# EAGLE board HeepTeensyBoard (EAGLE 7.3.0)
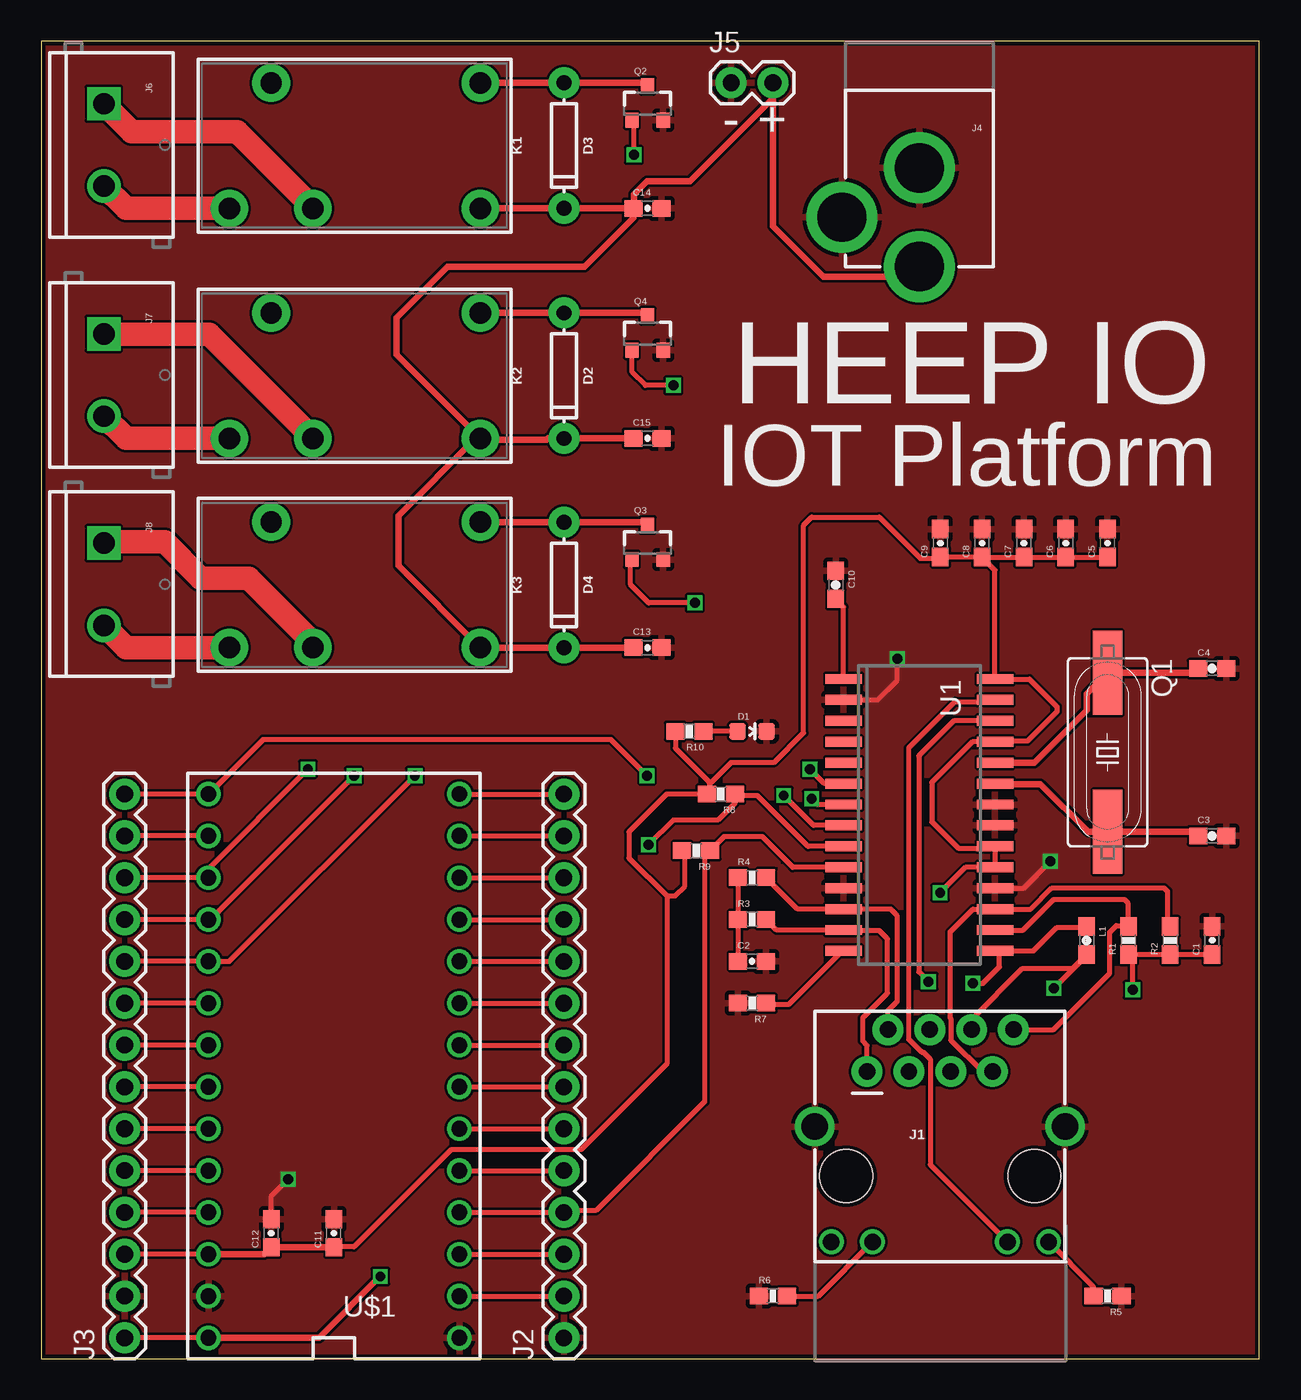
[diagram p0: board, top side]
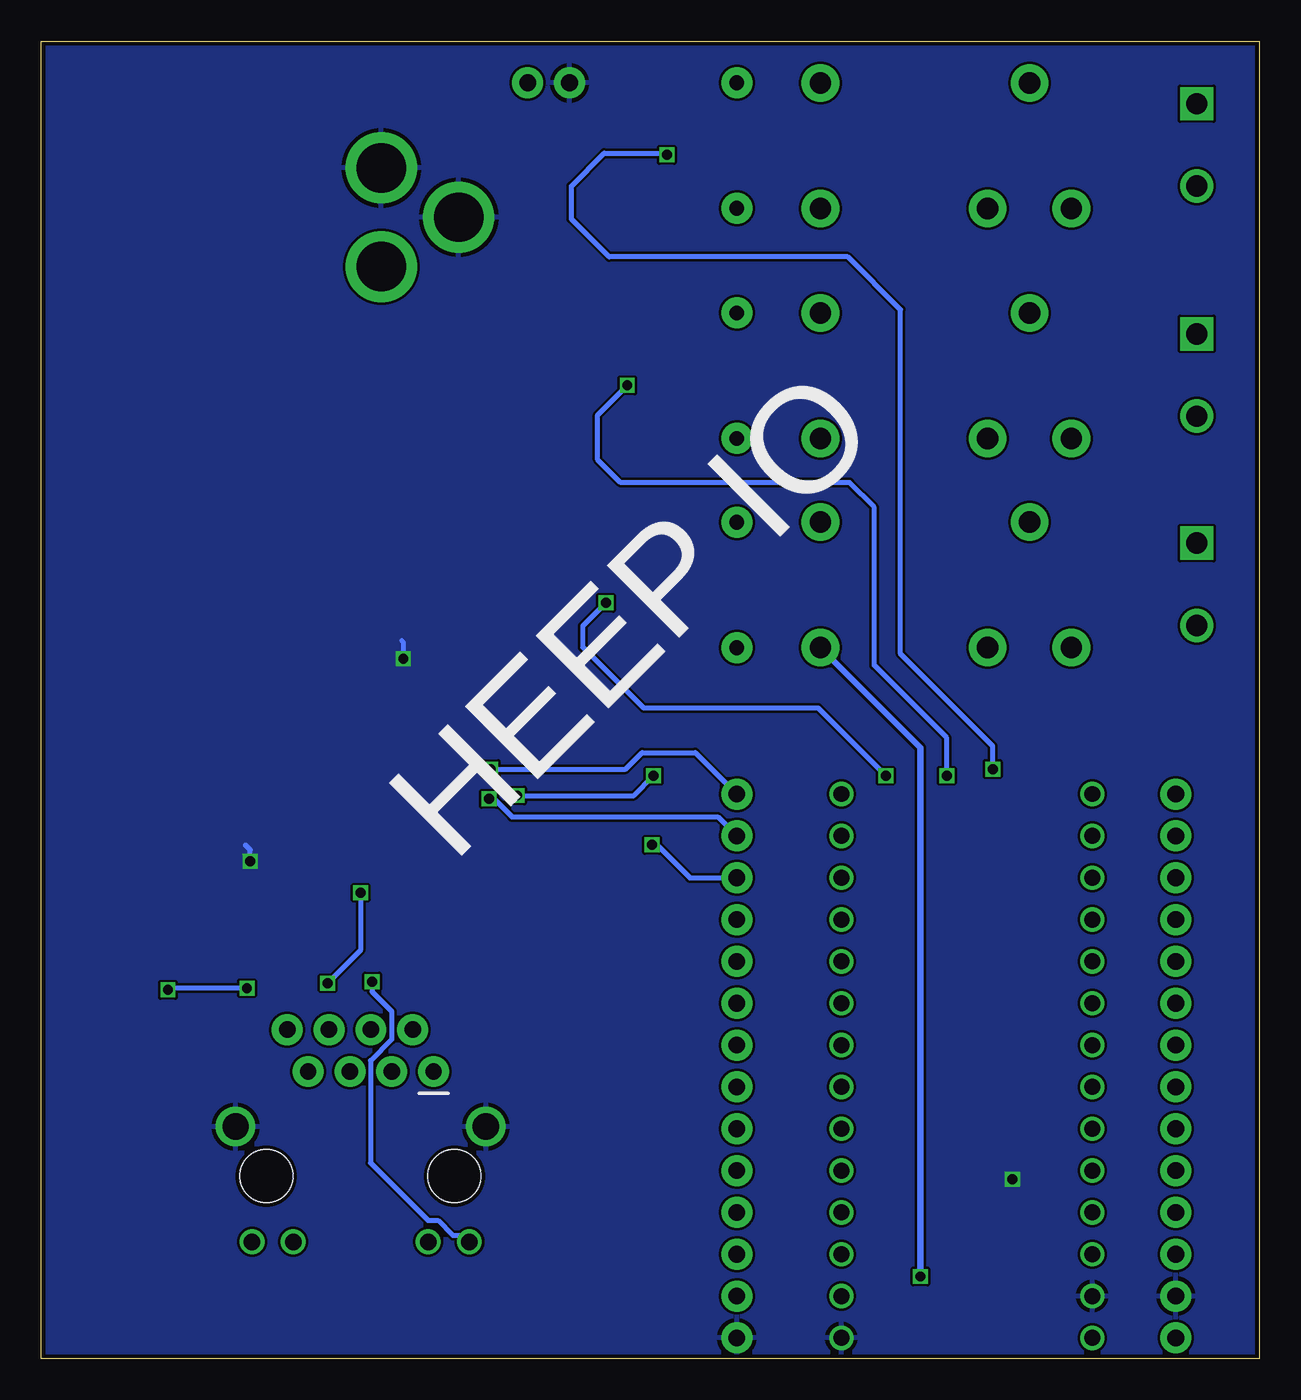
[diagram p1: board, bottom side, seen from below]

Size 74 x 80 mm. Coordinates in mm from the lower left corner, seen from the top.
Outline: 0,0 74,0 74,80 0,80 0,0
Copper layers (1*16): Top 0.035mm / dielectric 1.5mm / Bottom 0.035mm
Design rules "SeeedStudio_2layer_DRU_no_angle_20140221": minimum track width 6mil, minimum drill 12mil, track to track 6mil, track to pad 6mil, pad to pad 6mil, via to via 6mil, smd to smd 0mil, copper to edge 10mil, drill to drill 10mil, minimum pad ring 10mil, minimum via ring 6mil, stop-mask expansion 2mil, vias tented up to drill 100mil, thermal gap 10mil

## Footprints (pad centres in the part's own frame; a part is rotated, then mirrored left to right if it is on the bottom)
0603-CAP = smd 1.1 x 1: 1 -0.85,0; 2 0.85,0
LED-0603 = smd 1 x 1: A 0,-0.877; C 0,0.877
DIODE-1N4148 = drill 0.9 pad 1.88: A -3.81,0; C 3.81,0
MAGJACK = drill 1 pad 1.88: 1 3.175,17.445; 2 4.445,19.985; 3 5.715,17.445; 4 6.985,19.985; 5 8.255,17.445; 6 9.525,19.985; 7 10.795,17.445; 8 12.065,19.985 | drill 1 pad 1.27: 9 1,7.1; 10 3.5,7.1; 11 11.7,7.1; 12 14.2,7.1 | drill 1.6 pad 2.184: M1 0,14.1; M2 15.2,14.1 | hole 3.2: 1.905,11.095; 13.335,11.095
1X14 = drill 1.016 pad 1.88: 1 0,0; 2 2.54,0; 3 5.08,0; 4 7.62,0; 5 10.16,0; 6 12.7,0; 7 15.24,0; 8 17.78,0; 9 20.32,0; 10 22.86,0; 11 25.4,0; 12 27.94,0; 13 30.48,0; 14 33.02,0
POWER_JACK_PTH = drill 2.997 pad 4.318: GND 0,7.7; GNDBREAK 4.7,10.7; PWR 0,13.7
1X02 = drill 1.016 pad 1.88: 1 0,0; 2 2.54,0
SCREWTERMINAL-5MM-2 = drill 1.3 pad 2.032 square: 1 0,0 | drill 1.3 pad 2.032: 2 5,0
RELAY-JZC = drill 1.3 pad 2.286: 1 3.81,-8.89; 2 -3.81,1.27; 3 -3.81,6.35; 4 3.81,3.81; 5 -3.81,-8.89
0603 = smd 1.1 x 1: 1 -0.85,0; 2 0.85,0
SM49 = smd 5.08 x 1.778: 1 -4.826,0; 2 4.826,0
SOT23-3 = smd 0.8 x 0.9: 1 -0.95,-1; 2 0.95,-1; 3 0,1.1
0603-RES = smd 1.1 x 1: 1 -0.85,0; 2 0.85,0
SO28W = smd 0.6 x 2.2: 1 -8.255,-4.6; 2 -6.985,-4.6; 3 -5.715,-4.6; 4 -4.445,-4.6; 5 -3.175,-4.6; 6 -1.905,-4.6; 7 -0.635,-4.6; 8 0.635,-4.6; 9 1.905,-4.6; 10 3.175,-4.6; 11 4.445,-4.6; 12 5.715,-4.6; 13 6.985,-4.6; 14 8.255,-4.6; 15 8.255,4.6; 16 6.985,4.6; 17 5.715,4.6; 18 4.445,4.6; 19 3.175,4.6; 20 1.905,4.6; 21 0.635,4.6; 22 -0.635,4.6; 23 -1.905,4.6; 24 -3.175,4.6; 25 -4.445,4.6; 26 -5.715,4.6; 27 -6.985,4.6; 28 -8.255,4.6
TEENSY_3.0-3.2&LC_DIL = drill 0.965: 0 -7.62,13.97; 1 -7.62,11.43; 2 -7.62,8.89; 3 -7.62,6.35; 3.3V 7.62,11.43; 4 -7.62,3.81; 5 -7.62,1.27; 6 -7.62,-1.27; 7 -7.62,-3.81; 8 -7.62,-6.35; 9 -7.62,-8.89; 10 -7.62,-11.43; 11 -7.62,-13.97; 12 -7.62,-16.51; 13 7.62,-16.51; 14/A0 7.62,-13.97; 15/A1 7.62,-11.43; 16/A2 7.62,-8.89; 17/A3 7.62,-6.35; 18/A4 7.62,-3.81; 19/A5 7.62,-1.27; 20/A6 7.62,1.27; 21/A7 7.62,3.81; 22/A8 7.62,6.35; 23/A9 7.62,8.89; AGND 7.62,13.97; GND -7.62,16.51; VIN 7.62,16.51

## Placement (x,y rotation side)
C1  0.1uF  [0603-CAP]  71.12,25.4 90 top
C2  0.1uF  [0603-CAP]  43.18,24.13 0 top
C3  10pF  [0603-CAP]  71.12,31.75 0 top
C4  10pF  [0603-CAP]  71.12,41.91 0 top
C5  0.1uF  [0603-CAP]  64.77,49.53 90 top
C6  0.1uF  [0603-CAP]  62.23,49.53 90 top
C7  0.1uF  [0603-CAP]  59.69,49.53 90 top
C8  0.1uF  [0603-CAP]  57.15,49.53 90 top
C9  0.1uF  [0603-CAP]  54.61,49.53 90 top
C10  10uF  [0603-CAP]  48.26,46.99 270 top
C11  0.1uF  [0603-CAP]  17.78,7.62 90 top
C12  0.1uF  [0603-CAP]  13.97,7.62 90 top
C13  0.1uF  [0603-CAP]  36.83,43.18 0 top
C14  0.1uF  [0603-CAP]  36.83,69.85 0 top
C15  0.1uF  [0603-CAP]  36.83,55.88 0 top
D1  RED  [LED-0603]  43.18,38.1 270 top
D2  200mA/100V/1V  [DIODE-1N4148]  31.75,59.69 270 top
D3  200mA/100V/1V  [DIODE-1N4148]  31.75,73.66 270 top
D4  200mA/100V/1V  [DIODE-1N4148]  31.75,46.99 270 top
J1  MAGJACK  [MAGJACK]  46.99,0 0 top
J2  [1X14]  31.75,1.27 90 top
J3  [1X14]  5.08,1.27 90 top
J4  POWER_JACKPTH  [POWER_JACK_PTH]  53.34,80.01 180 top
J5  [1X02]  41.91,77.47 0 top
J6  [SCREWTERMINAL-5MM-2]  3.81,76.2 270 top
J7  [SCREWTERMINAL-5MM-2]  3.81,62.23 270 top
J8  [SCREWTERMINAL-5MM-2]  3.81,49.53 270 top
K1  RELAY-SPDT-JZC-11F  [RELAY-JZC]  17.78,73.66 90 top
K2  RELAY-SPDT-JZC-11F  [RELAY-JZC]  17.78,59.69 90 top
K3  RELAY-SPDT-JZC-11F  [RELAY-JZC]  17.78,46.99 90 top
L1  [0603]  63.5,25.4 270 top
Q1  25MHz  [SM49]  64.77,36.83 270 top
Q2  [SOT23-3]  36.83,76.2 0 top
Q3  [SOT23-3]  36.83,49.53 0 top
Q4  [SOT23-3]  36.83,62.23 0 top
R1  51  [0603-RES]  66.04,25.4 90 top
R2  51  [0603-RES]  68.58,25.4 90 top
R3  51  [0603-RES]  43.18,26.67 0 top
R4  51  [0603-RES]  43.18,29.21 0 top
R5  200  [0603-RES]  64.77,3.81 180 top
R6  200  [0603-RES]  44.45,3.81 0 top
R7  2k @ 1% Tolerance  [0603-RES]  43.18,21.59 180 top
R8  10k  [0603-RES]  41.28,34.29 180 top
R9  10k  [0603-RES]  39.78,30.85 180 top
R10  200  [0603-RES]  39.37,38.1 180 top
U1  ENC28J60-SO  [SO28W]  53.34,33.02 270 top
U$1  TEENSY_3.1-3.2_DIL  [TEENSY_3.0-3.2&LC_DIL]  17.78,17.78 180 top

## Library data of the parts
C1 C2 C5-C9 C11-C15 = SparkFun-Capacitors
C3 C4 C10 L1 R7-R10 = SparkFun-Passives
D1 = SparkFun-LED; PROD_ID: DIO-00819
D2-D4 = SparkFun-DiscreteSemi; PROD_ID: DIO-08378
J1 = SparkFun-Connectors; PROD_ID: CONN-09556; SF_ID: PRT-08534
J2 J3 J5 = SparkFun-Connectors
J4 = SparkFun-Connectors; PROD_ID: CONN-08197
J6-J8 = SparkFun-Connectors; STOREFRONT_ID: PRT-08432
K1-K3 = SparkFun-Electromechanical; PROD_ID: COMP-09533; SF_SKU: COM-00100
Q1 = adafruit; OC_FARNELL: unknown; OC_NEWARK: unknown
Q2-Q4 = SparkFun-DiscreteSemi; PROD_ID: TRANS-08049
R1-R6 = SparkFun-Resistors
U1 = microchip-enc28j60
U$1 = Teensy_3_and_LC_Series_Boards_v1.4

## Nets
3.3V: C5.1 C6.1 C7.1 C8.1 C9.1 C11.1 C12.1 J3.3 L1.1 R8.2 R9.2 R10.2 U1.15 U1.19 U1.20 U1.25 U1.28 U$1.3.3V
#CS: J2.12 R8.1 U1.9 U$1.10
#RESET: J2.4 R9.1 U1.10 U$1.2
GND: C1.2 C2.2 C3.2 C4.2 C5.2 C6.2 C7.2 C8.2 C9.2 C10.1 C11.2 C12.2 C13.2 C14.2 C15.2 D1.C J1.M1 J1.M2 J2.1 J3.2 J4.GND J4.GNDBREAK J5.1 Q2.2 Q3.2 Q4.2 R5.1 R6.1 R7.2 U1.2 U1.11 U1.18 U1.21 U1.22 U$1.AGND U$1.GND
LEDA: J1.11 U1.27
LEDB: J1.9 U1.26
N$1: J1.1 R3.2 U1.13
N$2: J1.2 R4.2 U1.12
N$3: J1.8 R1.2 U1.16
N$4: J1.7 R2.2 U1.17
N$5: C2.1 R3.1 R4.1
N$6: J1.10 R6.2
N$7: C1.1 J1.6 L1.2 R1.1 R2.1
N$8: D1.A R10.1
N$9: D3.A K1.1 Q2.3
N$10: J1.12 R5.2
N$11: D2.A K2.1 Q4.3
N$12: C3.1 Q1.2 U1.23
N$13: C4.1 Q1.1 U1.24
N$14: D4.A K3.1 Q3.3
N$15: R7.1 U1.14
N$16: J6.1 K1.2
N$17: C10.2 U1.1
N$18: J6.2 K1.3
N$19: J7.1 K2.2
N$20: J7.2 K2.3
N$21: J8.1 K3.2
N$22: J8.2 K3.3
SCK: J3.14 U1.8 U$1.13
SI: J2.13 U1.7 U$1.11
SO: J2.14 U1.6 U$1.12
TEENSY0: J2.2 U$1.0
TEENSY1: J2.3 U$1.1
TEENSY3: J2.5 U$1.3
TEENSY4: J2.6 U$1.4
TEENSY5: J2.7 U$1.5
TEENSY6: J2.8 U$1.6
TEENSY7: J2.9 U$1.7
TEENSY8: J2.10 U$1.8
TEENSY9: J2.11 U$1.9
TEENSY14: J3.13 U$1.14/A0
TEENSY15: J3.12 Q2.1 U$1.15/A1
TEENSY16: J3.11 Q4.1 U$1.16/A2
TEENSY17: J3.10 Q3.1 U$1.17/A3
TEENSY18: J3.9 U$1.18/A4
TEENSY19: J3.8 U$1.19/A5
TEENSY20: J3.7 U$1.20/A6
TEENSY21: J3.6 U$1.21/A7
TEENSY22: J3.5 U$1.22/A8
TEENSY23: J3.4 U$1.23/A9
VIN: C13.1 C14.1 C15.1 D2.C D3.C D4.C J3.1 J4.PWR J5.2 K1.5 K2.5 K3.5 U$1.VIN

## Tracks (layer width: path | path; a pad name or v marks a point on that pad's centre or on a via)
3.3V  (via drill 0.6)
  Top 0.305: L1.1 63.45,26.2 61.7,26.2 60.27,24.77 U1.15 58.2,24.5 58.2,23.8 57.2,22.8 v56.6,22.8 | C8.1 57.94,47.89 U1.28 60.02,41.27 61.7,39.6 61.7,39.3 59.9,37.5 57.98,37.5 U1.25 56.56,37.47 54.1,35 54.1,32.6 55.7,31 57.83,31 U1.20 U1.19 56.15,29.84 v54.6,28.3 | C8.1 C7.1 C6.1 C5.1 | C8.1 C9.1 54.53,48.6 53.4,48.6 50.9,51.1 46.8,51.1 46.3,50.6 46.3,38 44.5,36.2 41.9,36.2 40.6,34.9 | R10.2 38.52,37.08 40.6,35 40.6,34.9 | 40.6,34.9 40.6,34.46 R8.2 37.99,34.29 35.7,32 35.7,30.4 38,28.1 | 38,28.1 38.5,28.1 39.1,28.7 39.1,30.68 R9.2 | 38,28.1 38,17.9 32.8,12.7 24.9,12.7 19,6.8 17.81,6.8 C11.1 | U$1.3.3V J3.3
  Top 0.406: U$1.3.3V 13.55,6.35 C12.1 C11.1
  Bottom 0.305: v54.6,28.3 54.6,24.8 v56.6,22.8
#CS  (via drill 0.6)
  Top 0.305: U1.9 46.59,31.11 43.5,34.2 42.22,34.2 R8.1 42.13,33.73 41.1,32.7 38.4,32.7 v36.9,31.2 | U$1.10 J2.12 | J2.12 32.29,29.21 32.3,29.2 J2.12
  Bottom 0.305: v36.9,31.2 36.6,31.2 34.6,29.2 J2.12
#RESET
  Top 0.305: U1.10 45.66,29.84 43.8,31.7 41.48,31.7 R9.1 40.3,30.52 40.3,15.6 33.7,9 31.86,9 J2.4 U$1.2
GND  (via drill 0.6)
  Top 0.305: U1.18 59.67,28.57 v61.3,30.2 | U1.2 50.8,40.01 52,41.2 v52,42.5 | C12.2 13.97,9.87 v15,10.9
  Bottom 0.305: v61.3,30.2 61.3,30.9 61.6,31.2 | v52,42.5 52,43.5 52.1,43.6 | v15,10.9 15.2,10.9 15.3,10.8
  pour Top: -12.7,88.9 109.22,88.9 109.22,-7.62 -12.7,-7.62
  pour Bottom: -8.9,85.4 107.5,85.4 107.5,67.8 107.5,-5.1 -8.9,-5.1
LEDA
  Top 0.305: U1.27 57.84,39.9 55.5,39.9 52.7,37.1 52.7,19.4 53.5,18.6 53.6,18.6 54,18.2 54,11.79 J1.11
LEDB  (via drill 0.6)
  Top 0.305: U1.26 55.44,38.73 53.3,36.6 53.3,23.5 v53.9,22.9
  Bottom 0.305: v53.9,22.9 53.9,22.3 52.7,21.1 52.7,19.4 54,18.1 54,11.9 50.5,8.4 49.9,8.4 49,7.5 48.39,7.5 J1.9
N$1
  Top 0.305: J1.1 50.16,19.04 49.9,19.3 49.9,20.7 51.4,22.2 51.4,25.5 50.9,26 48.77,26 U1.13 44.66,26.04 R3.2
N$2
  Top 0.305: J1.2 51.44,21.14 52,21.7 52,26.9 51.6,27.3 U1.12 45.94,27.3 R4.2
N$3
  Top 0.305: U1.16 59.63,26.04 61.5,27.9 65.8,27.9 66,27.7 66,26.29 R1.2 65.99,26.3 65.3,26.3 64.9,25.9 64.9,23.4 61.48,19.98 J1.8
N$4
  Top 0.305: R2.2 68.4,26.43 68.4,28.4 68.2,28.6 61.4,28.6 60.1,27.3 U1.17 56.6,27.3 55.2,25.9 55.2,20.7 55.25,20.65 55.25,19.35 57.16,17.45 J1.7
N$5
  Top 0.305: R4.1 R3.1 C2.1
N$6
  Top 0.305: R6.2 47.2,3.81 J1.10
N$7  (via drill 0.6)
  Top 0.305: J1.6 56.52,20.61 59.6,23.7 62.65,23.7 L1.2 63.5,24.5 v61.5,22.5 | v66.3,22.4 66.3,24.29 R1.1 R2.1 C1.1
  Bottom 0.305: v61.5,22.5 66.2,22.5 v66.3,22.4
N$8
  Top 0.305: D1.A R10.1
N$9
  Top 0.406: Q2.3 36.66,77.47 D3.A K1.1
N$10
  Top 0.305: R5.2 63.92,4.37 J1.12
N$11
  Top 0.406: K2.1 D2.A 36.66,63.5 Q4.3
N$12
  Top 0.406: C3.1 70.02,32 Q1.2 63.6,32 60.7,34.9 57.97,34.9 U1.23
N$13
  Top 0.406: U1.24 60.33,36.2 63.5,39.37 63.5,40.39 Q1.1 70.02,41.66 C4.1
N$14
  Top 0.406: Q3.3 36.66,50.8 D4.A K3.1
N$15
  Top 0.305: U1.14 48.66,24.77 45.4,21.5 44.12,21.5 R7.1
N$16
  Top 1.422: K1.2 16.51,69.89 11.9,74.5 5.51,74.5 J6.1
N$17
  Top 0.305: U1.1 48.74,45.66 C10.2
N$18
  Top 1.422: K1.3 5.16,69.85 J6.2
N$19
  Top 1.422: K2.2 10.2,62.2 3.84,62.2 J7.1
N$20
  Top 1.422: K2.3 5.16,55.88 J7.2
N$21
  Top 1.422: K3.2 16.51,43.49 12.6,47.4 9.7,47.4 7.5,49.6 3.88,49.6 J8.1
N$22
  Top 1.422: K3.3 5.16,43.18 J8.2
SCK  (via drill 0.6)
  Top 0.305: U1.8 46.91,32.38 v45.1,34.2 | v36.8,35.4 34.6,37.6 13.47,37.6 U$1.13 J3.14
  Bottom 0.305: v45.1,34.2 38,34.2 v36.8,35.4
SI  (via drill 0.6)
  Top 0.305: U1.7 47.15,33.66 v46.8,34 | U$1.11 J2.13
  Bottom 0.305: v46.8,34 46.5,34 45.4,32.9 32.9,32.9 J2.13
SO  (via drill 0.6)
  Top 0.305: U1.6 47.58,34.92 v46.7,35.8 | U$1.12 J2.14
  Bottom 0.305: v46.7,35.8 38.5,35.8 37.5,36.8 34.26,36.8 J2.14
TEENSY0
  Top 0.305: U$1.0 J2.2 | J2.2 32.29,3.81 32.4,3.7 31.86,3.7 J2.2
TEENSY1
  Top 0.305: U$1.1 J2.3
TEENSY3
  Top 0.305: U$1.3 J2.5
TEENSY4
  Top 0.305: U$1.4 J2.6
TEENSY5
  Top 0.305: U$1.5 J2.7
TEENSY6
  Top 0.305: U$1.6 J2.8
TEENSY7
  Top 0.305: U$1.7 J2.9
TEENSY8
  Top 0.305: U$1.8 J2.10
TEENSY9
  Top 0.305: U$1.9 J2.11
TEENSY14
  Top 0.305: U$1.14/A0 J3.13
TEENSY15  (via drill 0.6)
  Top 0.305: v16.2,35.8 10.16,29.76 U$1.15/A1 J3.12 | v36,73.1 36,75.08 Q2.1
  Bottom 0.305: v16.2,35.8 16.2,37.2 21.8,42.8 21.8,63.7 25,66.9 39.5,66.9 41.8,69.2 41.8,71.2 39.8,73.2 36.1,73.2 v36,73.1
TEENSY16  (via drill 0.6)
  Top 0.305: v19,35.4 10.27,26.67 U$1.16/A2 J3.11 | v38.4,59.1 36.7,59.1 35.9,59.9 35.9,61.21 Q4.1
  Bottom 0.305: v19,35.4 19,37.7 23.4,42.1 23.4,51.7 24.9,53.2 38.8,53.2 40.2,54.6 40.2,57.3 v38.4,59.1
TEENSY17  (via drill 0.6)
  Top 0.305: v22.7,35.4 11.43,24.13 U$1.17/A3 J3.10 | v39.7,45.9 36.9,45.9 35.8,47 35.8,48.45 Q3.1
  Bottom 0.305: v22.7,35.4 26.8,39.5 37.4,39.5 41.1,43.2 41.1,44.5 v39.7,45.9
TEENSY18
  Top 0.305: U$1.18/A4 J3.9
TEENSY19
  Top 0.305: U$1.19/A5 J3.8
TEENSY20
  Top 0.305: U$1.20/A6 J3.7
TEENSY21
  Top 0.305: U$1.21/A7 J3.6
TEENSY22
  Top 0.305: U$1.22/A8 J3.5
TEENSY23
  Top 0.305: U$1.23/A9 J3.4
VIN  (via drill 0.6)
  Top 0.305: U$1.VIN J3.1
  Top 0.406: J5.2 44.45,76.55 | 44.45,76.55 39.4,71.5 36.8,71.5 36,70.7 36,69.87 C14.1 | 44.45,76.55 44.45,68.75 47.5,65.7 52.73,65.7 J4.PWR | C14.1 D3.C K1.5 | C15.1 D2.C 30.78,55.88 30.7,55.8 26.75,55.8 | 26.75,55.8 K2.5 21.6,60.95 21.6,63.2 24.7,66.3 33,66.3 35.98,69.28 C14.1 | C13.1 D4.C K3.5 21.7,48.15 21.7,51.2 26.3,55.8 26.75,55.8 | U$1.VIN 16.87,1.27 v20.6,5
  Bottom 0.406: v20.6,5 20.6,37.11 K3.5

## Text on the board
tPlace: - | + | HEEP IO | IOT Platform
bPlace: HEEP IO